# EAGLE board nixieshield-v1.0 (EAGLE 7.6.0)
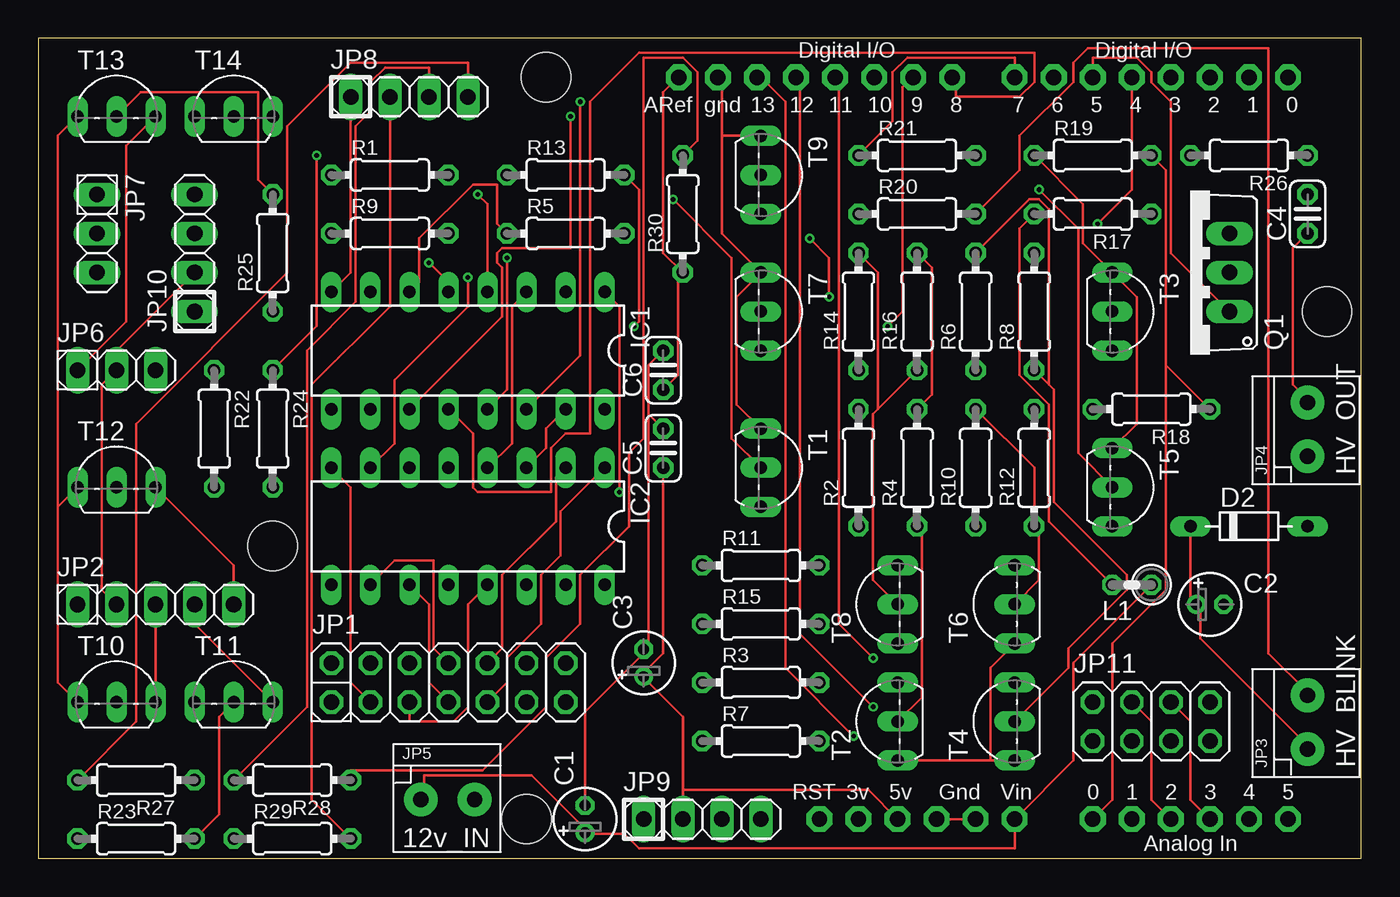
[diagram p0: board, top side]
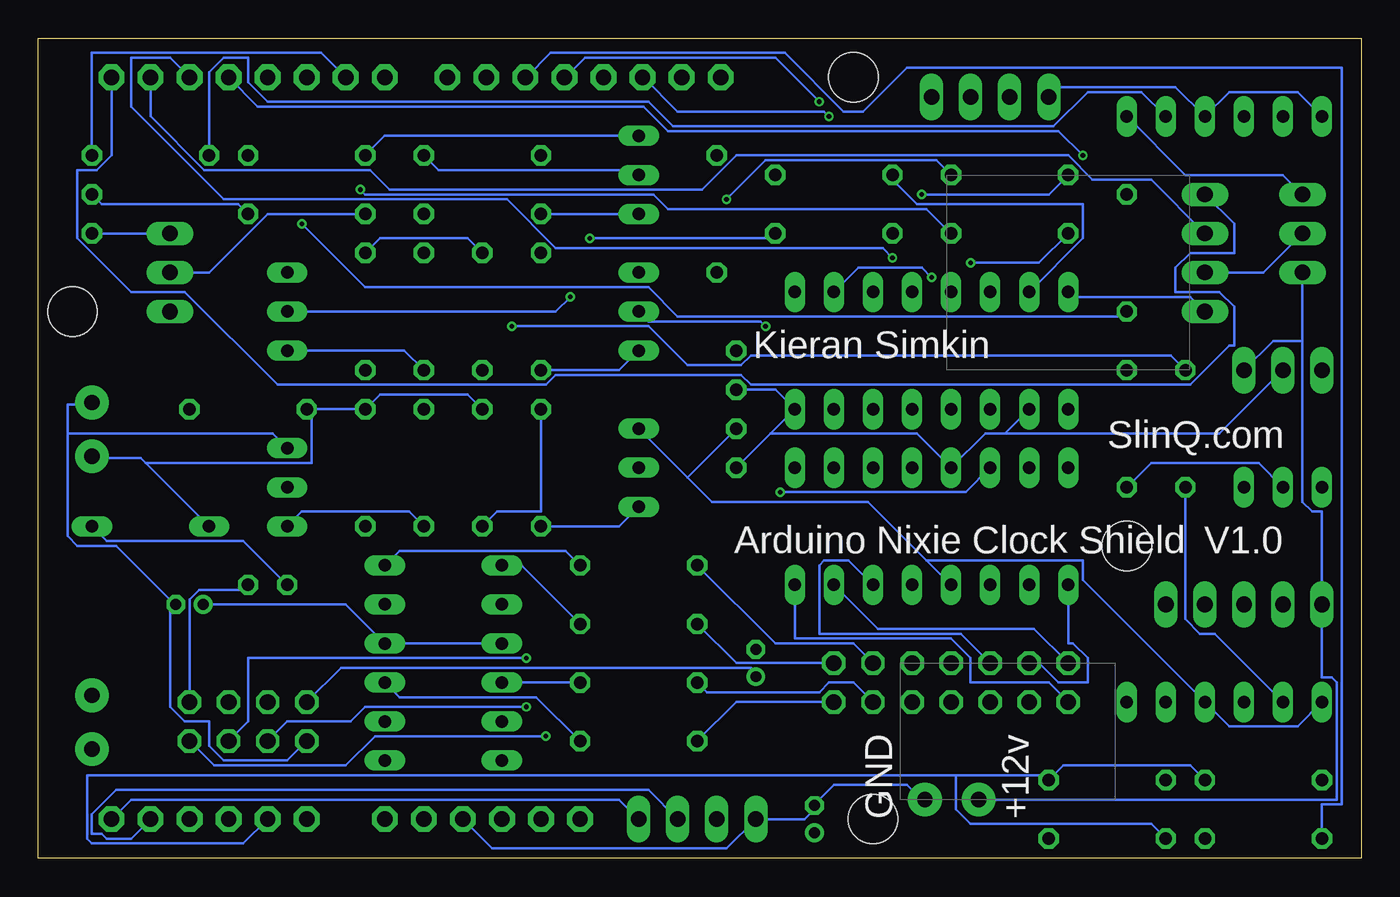
[diagram p1: board, bottom side, seen from below]

Size 86.03 x 53.33 mm. Coordinates in mm from the lower left corner, seen from the top.
Outline: 0,0 86.03,0 86.03,53.33 0,53.33 0,0
Copper layers (1*16): Top 0.035mm / dielectric 1.5mm / Bottom 0.035mm
Design rules "SeeedStudio_2layer_DRU_no_angle_20140221": minimum track width 6mil, minimum drill 12mil, track to track 6mil, track to pad 6mil, pad to pad 6mil, via to via 6mil, smd to smd 0mil, copper to edge 10mil, drill to drill 10mil, minimum pad ring 10mil, minimum via ring 6mil, stop-mask expansion 2mil, vias tented up to drill 100mil, thermal gap 10mil
Holes 3.2 mm at 15.24,20.32

## Footprints (pad centres in the part's own frame; a part is rotated, then mirrored left to right if it is on the bottom)
E1,8-4 = drill 0.711 pad 1.168: + -0.889,0 | drill 0.711 pad 1.168 octagon: - 0.889,0
C025-024X044 = drill 0.813 octagon: 1 -1.27,0; 2 1.27,0
D-7.5 = drill 0.813 long: A 3.81,0; C -3.81,0
DIL16 = drill 0.813 long: 1 -8.89,-3.81; 2 -6.35,-3.81; 3 -3.81,-3.81; 4 -1.27,-3.81; 5 1.27,-3.81; 6 3.81,-3.81; 7 6.35,-3.81; 8 8.89,-3.81; 9 8.89,3.81; 10 6.35,3.81; 11 3.81,3.81; 12 1.27,3.81; 13 -1.27,3.81; 14 -3.81,3.81; 15 -6.35,3.81; 16 -8.89,3.81
2X07 = drill 1.016 octagon: 1 -7.62,-1.27; 2 -7.62,1.27; 3 -5.08,-1.27; 4 -5.08,1.27; 5 -2.54,-1.27; 6 -2.54,1.27; 7 0,-1.27; 8 0,1.27; 9 2.54,-1.27; 10 2.54,1.27; 11 5.08,-1.27; 12 5.08,1.27; 13 7.62,-1.27; 14 7.62,1.27
1X05 = drill 1.016 long: 1 -5.08,0; 2 -2.54,0; 3 0,0; 4 2.54,0; 5 5.08,0
1X2-3.5MM = drill 1 pad 2.184: 1 1.8,0; 2 -1.7,0
1X03 = drill 1.016 long: 1 -2.54,0; 2 0,0; 3 2.54,0
1X04 = drill 1.016 long: 1 -3.81,0; 2 -1.27,0; 3 1.27,0; 4 3.81,0
2X04 = drill 1.016 octagon: 1 -3.81,-1.27; 2 -3.81,1.27; 3 -1.27,-1.27; 4 -1.27,1.27; 5 1.27,-1.27; 6 1.27,1.27; 7 3.81,-1.27; 8 3.81,1.27
0207/2V = drill 0.813 octagon: 1 -1.27,0; 2 1.27,0
TO220AV = drill 1.016 long: B -2.54,-2.54; C 0,-2.54; E 2.54,-2.54
0204/7 = drill 0.813 octagon: 1 -3.81,0; 2 3.81,0
TO92-EBC = drill 0.813 long: B 0,-1.27; C 2.54,-1.27; E -2.54,-1.27
TO92-EBC-OVAL = drill 0.813 long: B 0,-1.27; C 2.54,-1.27; E -2.54,-1.27
ARDUINO = drill 1 pad 1.676 octagon: 3V 35.56,2.54; 5V 38.1,2.54; A0 50.8,2.54; A1 53.34,2.54; A2 55.88,2.54; A3 58.42,2.54; A4 60.96,2.54; A5 63.5,2.54; AREF 23.876,50.8; D0 63.5,50.8; D1 60.96,50.8; D2 58.42,50.8; D3 55.88,50.8; D4 53.34,50.8; D5 50.8,50.8; D6 48.26,50.8; D7 45.72,50.8; D8 41.656,50.8; D9 39.116,50.8; D10 36.576,50.8; D11 34.036,50.8; D12 31.496,50.8; D13 28.956,50.8; GND 26.416,50.8; GND1 43.18,2.54; GND2 40.64,2.54; RESET 33.02,2.54; VIN 45.72,2.54 | hole 3.2: 15.24,50.8; 66.04,35.56; 13.97,2.54

## Placement (x,y rotation side)
C1  220uF  [E1,8-4]  35.56,2.54 90 top
C2  2.2uF 200v  [E1,8-4]  76.2,16.51 0 top
C3  220uF  [E1,8-4]  39.37,12.7 90 top
C4  100pF  [C025-024X044]  82.55,41.91 90 top
C5  100nF  [C025-024X044]  40.64,26.67 90 top
C6  100nF  [C025-024X044]  40.64,31.75 90 top
D2  4004  [D-7.5]  78.74,21.59 0 top
IC1  74HC595N  [DIL16]  27.94,33.02 180 top
IC2  IC_74141-DIP-16  [DIL16]  27.94,21.59 180 top
JP1  TUBES  [2X07]  26.67,11.43 0 top
JP2  ILLUM  [1X05]  7.62,16.51 0 top
JP3  HV_BLINK  [1X2-3.5MM]  82.55,8.89 270 top
JP4  HV_OUT  [1X2-3.5MM]  82.55,27.94 270 top
JP5  12v_IN  [1X2-3.5MM]  26.67,3.81 180 top
JP6  ALARM  [1X03]  5.08,31.75 0 top
JP7  BACKLIGHT  [1X03]  3.81,40.64 270 top
JP8  BUTTONS  [1X04]  24.13,49.53 0 top
JP9  I2C  [1X04]  43.18,2.54 0 top
JP10  UART  [1X04]  10.16,39.37 90 top
JP11  AUX  [2X04]  72.39,8.89 0 top
L1  120uH  [0207/2V]  71.12,17.78 180 top
Q1  IRL630A  [TO220AV]  74.93,38.1 90 top
R1  10k  [0204/7]  22.86,44.45 0 top
R2  470k  [0204/7]  53.34,25.4 90 top
R3  10k  [0204/7]  46.99,11.43 0 top
R4  100k  [0204/7]  57.15,25.4 90 top
R5  10k  [0204/7]  34.29,40.64 0 top
R6  470k  [0204/7]  60.96,35.56 90 top
R7  10k  [0204/7]  46.99,7.62 0 top
R8  100k  [0204/7]  64.77,35.56 90 top
R9  10k  [0204/7]  22.86,40.64 0 top
R10  470k  [0204/7]  60.96,25.4 90 top
R11  10k  [0204/7]  46.99,19.05 0 top
R12  100k  [0204/7]  64.77,25.4 90 top
R13  10k  [0204/7]  34.29,44.45 0 top
R14  470k  [0204/7]  53.34,35.56 90 top
R15  10k  [0204/7]  46.99,15.24 0 top
R16  100k  [0204/7]  57.15,35.56 90 top
R17  2k2  [0204/7]  68.58,41.91 180 top
R18  220k  [0204/7]  72.39,29.21 180 top
R19  2k2  [0204/7]  68.58,45.72 0 top
R20  10k  [0204/7]  57.15,41.91 0 top
R21  10k  [0204/7]  57.15,45.72 0 top
R22  1k  [0204/7]  11.43,27.94 270 top
R23  1k  [0204/7]  6.35,1.27 0 top
R24  1k  [0204/7]  15.24,27.94 270 top
R25  1k  [0204/7]  15.24,39.37 90 top
R26  1k  [0204/7]  78.74,45.72 180 top
R27  1k  [0204/7]  6.35,5.08 180 top
R28  4k7  [0204/7]  16.51,5.08 180 top
R29  10k  [0204/7]  16.51,1.27 0 top
R30  100k  [0204/7]  41.91,41.91 90 top
T1  MPSA44  [TO92-EBC]  48.26,25.4 270 top
T2  MPSA92  [TO92-EBC]  54.61,8.89 90 top
T3  MPSA44  [TO92-EBC]  71.12,35.56 270 top
T4  MPSA92  [TO92-EBC]  62.23,8.89 90 top
T5  MPSA44  [TO92-EBC]  71.12,24.13 270 top
T6  MPSA92  [TO92-EBC]  62.23,16.51 90 top
T7  MPSA44  [TO92-EBC]  48.26,35.56 270 top
T8  MPSA92  [TO92-EBC]  54.61,16.51 90 top
T9  MPSA44  [TO92-EBC]  48.26,44.45 270 top
T10  2N2222  [TO92-EBC-OVAL]  5.08,11.43 0 top
T11  2N2222  [TO92-EBC-OVAL]  12.7,11.43 0 top
T12  2N2222  [TO92-EBC-OVAL]  5.08,25.4 0 top
T13  2N2222  [TO92-EBC-OVAL]  5.08,49.53 0 top
T14  2N2222  [TO92-EBC-OVAL]  12.7,49.53 0 top
U$1  ARDUINOUNO  [ARDUINO]  17.78,0 0 top

## Library data of the parts
C1-C6 R1-R30 = resistor
D2 = diode
IC1 = 74xx-eu
IC2 = dp_devices
JP1 JP2 JP6-JP11 = pinhead
JP3-JP5 T10-T14 U$1 = adafruit
L1 = rcl
Q1 = transistor-power
T1-T9 = transistor

## Nets
+3V3: U$1.3V
+12V: C1.+ JP2.1 JP5.1 JP6.3 JP7.3 JP11.8 L1.1 U$1.VIN
A2: JP11.4 U$1.A2
A3: JP11.6 U$1.A3
ALARM: R25.1 U$1.D4
ANODE0: JP1.11 R3.1
ANODE1: JP1.12 R11.1
ANODE2: JP1.13 R7.1
ANODE3: JP1.14 R15.1
BACKLIGHT: R26.1 U$1.D6
BLINK: R21.1 U$1.D7
BOOSTPWM: Q1.B U$1.D5
BUTTONS: R27.1 R28.1 R29.1 R30.2 U$1.A1
DIGITS0: IC2.16 JP1.1
DIGITS1: IC2.15 JP1.2
DIGITS2: IC2.8 JP1.3
DIGITS3: IC2.9 JP1.4
DIGITS4: IC2.13 JP1.5
DIGITS5: IC2.14 JP1.6
DIGITS6: IC2.11 JP1.7
DIGITS7: IC2.10 JP1.8
DIGITS8: IC2.1 JP1.9
DIGITS9: IC2.2 JP1.10
GND: C1.- C2.- C3.- C4.1 C5.2 C6.2 IC1.8 IC2.12 JP4.2 JP5.2 JP8.1 JP9.1 JP10.1 JP11.1 Q1.E R19.1 T1.E T3.E T5.E T7.E T9.E T10.E T11.E T12.E T13.E T14.E U$1.GND U$1.GND1 U$1.GND2
LATCH: IC1.12 U$1.D8
LED_B: R24.1 U$1.D3
LED_G: R23.1 U$1.D10
LED_R: R22.1 U$1.D9
MISO: JP11.3 U$1.D12
MOSI: IC1.14 JP11.5 U$1.D11
N$1: IC1.1 IC2.6
N$2: IC1.2 IC2.7
N$3: IC1.3 IC2.4
N$4: IC1.15 IC2.3
N$5: R2.1 T1.C
N$6: R1.2 T1.B
N$7: R3.2 T2.C
N$8: R2.2 R4.1 T2.B
N$9: R5.2 T3.B
N$10: R7.2 T4.C
N$11: R6.1 T3.C
N$12: R6.2 R8.1 T4.B
N$13: R9.2 T5.B
N$14: R11.2 T6.C
N$15: R10.1 T5.C
N$16: R10.2 R12.1 T6.B
N$17: R13.2 T7.B
N$18: R15.2 T8.C
N$19: R14.1 T7.C
N$20: R14.2 R16.1 T8.B
N$21: D2.A L1.2 Q1.C R17.2
N$22: C4.2 R17.1
N$23: R20.1 T9.C
N$24: R21.2 T9.B
N$25: R22.2 T10.B
N$26: R23.2 T11.B
N$27: R24.2 T12.B
N$28: R25.2 T13.B
N$29: JP2.3 T10.C
N$30: JP2.4 T11.C
N$31: JP2.5 T12.C
N$32: JP3.2 R20.2
N$33: JP6.1 T13.C
N$34: R26.2 T14.B
N$35: JP7.1 T14.C
N$36: JP8.4 R27.2
N$37: JP8.3 R28.2
N$38: JP8.2 R29.2
OE: IC1.13 U$1.D2
RX: JP10.4 U$1.D0
SCK: IC1.11 JP11.7 U$1.D13
SCL: JP9.4 U$1.A5
SDA: JP9.3 U$1.A4
TUBE0: IC1.4 R1.1
TUBE1: IC1.5 R9.1
TUBE2: IC1.6 R5.1
TUBE3: IC1.7 R13.1
TX: JP10.3 U$1.D1
V+: C2.+ D2.C JP3.1 JP4.1 R4.2 R8.2 R12.2 R16.2 R18.2 T2.E T4.E T6.E T8.E
VCC: C3.+ C5.1 C6.1 IC1.10 IC1.16 IC2.5 JP2.2 JP6.2 JP7.2 JP9.2 JP10.2 JP11.2 R30.1 U$1.5V U$1.AREF
VSENSE: R18.1 R19.2 U$1.A0

## Tracks (layer width: path | path; a pad name or v marks a point on that pad's centre or on a via)
+12V
  Top 0.152: JP5.1 25.08,3.81 25.08,5.4 32.07,5.4 35.56,1.91 C1.+ 35.56,1.59 38.1,1.59 39.05,0.64 63.5,0.64 U$1.VIN 67.31,6.35 67.31,12.7 L1.1
  Bottom 0.152: JP7.3 3.81,33.66 | 3.81,33.66 3.81,23.18 3.17,22.54 2.54,22.54 JP2.1 2.54,11.75 1.91,11.75 1.59,11.43 1.59,3.81 JP5.1 | JP6.3 5.71,33.66 3.81,33.66 | L1.1 72.71,17.46 75.56,17.46 76.2,16.83 JP11.8
A2
  Top 0.152: JP11.4 72.39,8.89 72.39,3.81 U$1.A2
A3
  Top 0.152: JP11.6 74.93,8.89 74.93,3.81 U$1.A3
ALARM  (via drill 0.3)
  Top 0.152: v68.9,41.28 71.12,43.5 U$1.D4
  Bottom 0.152: R25.1 15.56,35.24 44.45,35.24 46.35,37.15 64.77,37.15 v68.9,41.28
ANODE0
  Bottom 0.152: R3.1 42.55,10.8 35.24,10.8 34.61,11.43 33.02,11.43 JP1.11
ANODE1
  Bottom 0.152: R11.1 38.1,13.97 33.02,13.97 JP1.12
ANODE2
  Bottom 0.152: R7.1 40.64,10.16 JP1.13
ANODE3
  Bottom 0.152: R15.1 40.64,12.7 JP1.14
BACKLIGHT
  Bottom 0.152: R26.1 82.55,52.39 67.63,52.39 U$1.D6
BLINK
  Top 0.152: R21.1 55.56,47.94 55.56,51.12 56.52,52.07 63.5,52.07 U$1.D7
BOOSTPWM
  Top 0.152: Q1.B 73.66,39.37 73.66,49.21 72.39,50.48 72.39,51.12 71.44,52.07 68.58,52.07 U$1.D5
BUTTONS
  Top 0.152: R30.2 42.86,46.67 42.86,51.12 41.91,52.07 39.37,52.07 39.37,27.31 38.42,26.35 38.42,21.59 35.24,18.41 35.24,15.24 33.02,13.02 33.02,9.84 28.89,5.71 20.32,5.71 R28.1
  Bottom 0.152: R29.1 13.65,2.22 25.4,2.22 26.35,3.18 26.35,5.4 | 26.35,5.4 20.64,5.4 R28.1 19.37,6.03 11.11,6.03 R27.1 | U$1.A1 72.71,0.95 82.55,0.95 82.87,1.27 82.87,5.4 26.35,5.4
DIGITS0
  Bottom 0.152: IC2.16 36.83,14.29 26.67,14.29 25.4,13.02 25.4,11.43 20.32,11.43 JP1.1
DIGITS1
  Bottom 0.152: IC2.15 31.43,14.92 21.27,14.92 JP1.2
DIGITS2
  Top 0.152: IC2.8 20.32,24.13 20.32,11.43 JP1.3
DIGITS3
  Bottom 0.152: IC2.9 19.05,13.97 18.73,13.97 17.78,13.02 17.78,11.43 19.68,11.43 20.95,12.7 JP1.4
DIGITS4
  Top 0.152: IC2.13 27.94,16.51 27.94,9.84 26.99,8.89 24.13,8.89 JP1.5
DIGITS5
  Bottom 0.152: IC2.14 33.34,19.37 34.92,19.37 35.24,19.05 35.24,14.61 26.04,14.61 JP1.6
DIGITS6
  Top 0.152: IC2.11 25.4,16.51 25.4,11.43 JP1.7
DIGITS7
  Top 0.152: IC2.10 23.18,19.37 25.72,19.37 25.72,13.65 JP1.8
DIGITS8
  Top 0.152: IC2.1 33.97,22.54 33.97,19.68 32.7,18.41 32.7,15.24 30.48,13.02 30.48,11.43 JP1.9
DIGITS9
  Top 0.152: IC2.2 33.66,24.77 33.66,21.91 30.16,18.41 30.16,13.65 JP1.10
GND
  Top 0.152: R19.1 67.94,42.55 67.94,40 T3.E 71.44,36.51 71.44,28.26 T5.E | C4.1 81.6,39.69 81.6,30.8 82.55,29.85 JP4.2 | U$1.GND1 U$1.GND2 | C1.- 35.56,9.53 39.37,13.34 C3.- 39.37,13.65 39.69,13.97 39.69,28.89 | IC1.8 20.32,38.1 JP8.1 | 1.27,22.86 T12.E | 1.27,22.86 1.27,11.43 T10.E | 44.45,46.99 44.45,50.8 U$1.GND | 44.45,46.99 44.45,40.64 T7.E 45.4,36.51 45.4,29.53 T1.E | 44.45,46.99 T9.E | C6.2 39.69,32.07 39.69,28.89 | C5.2 39.69,28.89 | T13.E 1.27,46.99 1.27,22.86
  Bottom 0.152: Q1.E C4.1 | 77.15,16.51 80.96,20.32 83.5,20.32 84.14,20.96 84.14,27.62 | 84.14,27.62 84.14,29.53 82.55,29.53 JP4.2 | T5.E 70.8,27.62 84.14,27.62 | JP11.1 69.85,6.35 73.98,6.35 74.93,7.3 74.93,8.89 76.52,8.89 77.47,9.84 77.47,16.51 77.15,16.51 | 77.15,16.51 C2.- | U$1.GND2 56.52,0.64 41.27,0.64 JP9.1 36.2,2.54 35.56,3.18 C1.- 35.56,3.49 34.29,4.76 29.53,4.76 28.57,3.81 JP5.2 | T13.E 4.13,49.85 8.57,49.85 T14.E 12.06,50.17 19.68,50.17 JP8.1 | JP10.1 11.11,36.51 18.73,36.51 IC1.8 | T10.E 4.13,8.57 8.57,8.57 T11.E 18.1,18.1 18.1,19.37 28.26,19.37 | 28.26,19.37 32.07,23.18 42.23,23.18 43.81,24.77 | 28.26,19.37 IC2.12 | T1.E 43.81,24.77 | 43.81,24.77 C5.2 | R19.1 63.5,46.99 T9.E
LATCH
  Top 0.152: IC1.12 28.26,27.62 28.26,24.13 28.57,23.81 33.34,23.81 33.34,26.67 34.29,27.62 35.88,27.62 35.88,49.21 39.05,52.39 64.77,52.39 64.77,50.48 63.82,49.53 59.69,49.53 59.69,50.8 U$1.D8
LED_B  (via drill 0.3)
  Top 0.152: R24.1 18.1,34.61 v18.1,45.72
  Bottom 0.152: v18.1,45.72 19.68,47.31 45.09,47.31 46.67,48.89 71.75,48.89 U$1.D3
LED_G
  Bottom 0.152: R23.1 2.54,3.49 1.27,3.49 1.27,51.44 29.53,51.44 32.38,48.58 33.66,48.58 37.47,52.39 52.7,52.39 54.29,50.8 U$1.D10
LED_R  (via drill 0.3)
  Top 0.152: v55.24,34.61 56.2,35.56 56.2,50.17 56.83,50.8 U$1.D9
  Bottom 0.152: R22.1 12.38,32.7 39.69,32.7 40.32,32.07 43.81,32.07 46.35,34.61 v55.24,34.61
MISO  (via drill 0.3)
  Top 0.152: v54.29,9.84 49.53,14.61 49.53,50.8 U$1.D12
  Bottom 0.152: JP11.3 69.85,8.89 65.72,8.89 64.77,9.84 v54.29,9.84
MOSI  (via drill 0.3)
  Top 0.152: IC1.14 35.24,32.7 v35.24,49.21 | v54.29,13.02 52.07,15.24 52.07,50.8 U$1.D11
  Bottom 0.152: v35.24,49.21 38.1,52.07 50.48,52.07 51.75,50.8 U$1.D11 | JP11.5 72.39,8.89 72.39,13.02 v54.29,13.02
N$1  (via drill 0.3)
  Top 0.152: v37.78,23.81 37.78,35.88 IC1.1
  Bottom 0.152: IC2.6 25.72,23.81 v37.78,23.81
N$2  (via drill 0.3)
  Top 0.152: IC2.7 23.18,26.99 23.18,31.11 27.94,35.88 v27.94,37.78
  Bottom 0.152: v27.94,37.78 28.57,38.42 32.7,38.42 IC1.2
N$3
  Top 0.152: IC2.4 30.8,26.99 30.8,35.88 IC1.3
N$4
  Top 0.152: IC2.3 33.02,26.67 33.02,27.94 IC1.15
N$5
  Bottom 0.152: T1.C 48.26,21.59 R2.1
N$6  (via drill 0.3)
  Top 0.152: v41.27,42.86 45.09,39.05 45.09,27.31 T1.B
  Bottom 0.152: R1.2 27.62,45.4 38.73,45.4 v41.27,42.86
N$7
  Bottom 0.152: T2.C R3.2
N$8
  Top 0.152: T2.B 57.47,10.48 57.47,21.27 R4.1
  Bottom 0.152: R2.2 53.34,22.54 56.2,22.54 R4.1
N$9  (via drill 0.3)
  Top 0.152: v50.16,40.32 51.44,39.05 v51.44,36.51
  Bottom 0.152: R5.2 38.42,40.32 v50.16,40.32 | v51.44,36.51 52.39,35.56 T3.B
N$10
  Bottom 0.152: R7.2 53.66,10.48 62.55,10.48 T4.C
N$11
  Bottom 0.152: R6.1 62.23,33.02 T3.C
N$12
  Top 0.152: T4.B 66.99,12.38 66.99,13.65 70.8,17.46 70.8,18.41 66.04,23.18 66.04,30.48 65.72,30.8 | R8.1 65.72,30.8 | R6.2 64.45,42.86 65.09,42.86 65.72,42.23 65.72,30.8
N$13  (via drill 0.3)
  Top 0.152: v65.09,43.5 67.63,40.96 67.63,26.35 T5.B
  Bottom 0.152: R9.2 28.26,42.23 45.09,42.23 46.04,43.18 64.77,43.18 v65.09,43.5
N$14
  Bottom 0.152: R11.2 51.75,20 62.55,20 T6.C
N$15
  Bottom 0.152: R10.1 61.91,22.54 68.9,22.54 T5.C
N$16
  Top 0.152: T6.B 65.09,18.1 65.09,21.27 R12.1 64.77,25.4 R10.2
N$17  (via drill 0.3)
  Top 0.152: R13.2 39.05,43.5 39.05,34.92 v38.73,34.61
  Bottom 0.152: v38.73,34.61 39.05,34.92 46.35,34.92 T7.B
N$18
  Bottom 0.152: R15.2 54.61,19.05 T8.C
N$19
  Bottom 0.152: T7.C 48.26,31.75 R14.1
N$20
  Top 0.152: T8.B 54.29,18.1 54.29,28.89 54.61,29.21 | R16.1 54.61,29.21 | R14.2 54.61,38.1 54.61,29.21
N$21
  Top 0.152: L1.2 65.72,21.91 65.72,29.53 63.82,31.43 63.82,40.96 R17.2
  Bottom 0.152: L1.2 72.71,20.64 81.6,20.64 D2.A | R17.2 71.12,41.91 74.93,38.1 Q1.C
N$22
  Bottom 0.152: R17.1 73.03,42.55 81.92,42.55 C4.2
N$23
  Bottom 0.152: R20.1 T9.C
N$24
  Bottom 0.152: T9.B 47.31,44.77 60.01,44.77 R21.2
N$25
  Bottom 0.152: T10.B 9.53,14.61 10.48,14.61 11.43,15.56 R22.2
N$26
  Top 0.152: R23.2 11.75,2.86 11.75,9.21 T11.B
N$27
  Bottom 0.152: T12.B 6.67,25.72 13.65,25.72 R24.2
N$28
  Top 0.152: T13.B 6.67,49.85 14.29,49.85 14.29,44.13 R25.2
N$29
  Top 0.152: JP2.3 T10.C
N$30
  Top 0.152: T11.C 10.16,15.24 JP2.4
N$31
  Top 0.152: T12.C 12.7,19.05 JP2.5
N$32
  Top 0.152: R20.2 63.82,44.77 63.82,46.99 67.31,50.48 67.31,51.75 68.26,52.7 80.01,52.7 80.01,13.34 82.55,10.8 JP3.2
N$33
  Top 0.152: T13.C 5.71,46.36 5.71,34.92 JP6.1
N$34
  Bottom 0.152: T14.B 14.29,49.85 17.78,49.85 20,47.62 44.77,47.62 46.35,49.21 71.12,49.21 72.39,50.48 72.39,52.07 73.98,52.07 74.93,51.12 R26.2
N$35
  Bottom 0.152: T14.C 11.43,44.45 5.08,44.45 JP7.1
N$36
  Top 0.152: R27.2 6.35,8.89 6.35,28.26 16.19,38.1 16.19,47.62 20.32,51.75 27.94,51.75 JP8.4
N$37
  Top 0.152: R28.2 17.46,9.84 17.46,33.02 20.64,36.2 20.64,47.62 21.59,48.58 21.59,50.48 22.54,51.44 25.4,51.44 JP8.3
N$38
  Top 0.152: R29.2 17.78,3.81 17.78,30.8 22.86,35.88 JP8.2
OE  (via drill 0.3)
  Top 0.152: IC1.13 30.48,30.48 v30.48,39.05
  Bottom 0.152: v30.48,39.05 31.11,39.69 52.39,39.69 55.56,42.86 73.98,42.86 80.01,48.89 80.01,52.07 77.47,52.07 U$1.D2
RX
  Bottom 0.152: JP10.4 8.26,41.28 8.26,39.37 11.11,39.37 12.06,38.42 12.06,36.83 9.21,36.83 8.26,35.88 8.26,33.34 8.57,33.34 11.11,30.8 39.69,30.8 40.32,31.43 52.39,31.43 53.02,30.8 70.48,30.8 76.52,36.83 80.01,36.83 83.5,40.32 83.5,44.77 82.23,44.77 81.28,45.72 U$1.D0
SCK  (via drill 0.3)
  Top 0.152: IC1.11 30.16,35.24 30.16,38.42 29.84,38.73 29.84,39.37 30.16,39.69 34.61,39.69 v34.61,48.26 | v53.02,7.94 48.58,12.38 48.58,49.21 46.99,50.8 U$1.D13
  Bottom 0.152: v34.61,48.26 34.92,48.58 44.45,48.58 46.67,50.8 U$1.D13 | JP11.7 74.61,6.03 66.04,6.03 64.14,7.94 v53.02,7.94
SCL
  Bottom 0.152: JP9.4 48.26,3.81 80.01,3.81 U$1.A5
SDA
  Bottom 0.152: JP9.3 46.35,4.45 80.96,4.45 82.55,2.86 82.55,1.59 81.92,1.59 81.6,1.27 80.01,1.27 U$1.A4
TUBE0  (via drill 0.3)
  Top 0.152: v28.57,43.18 29.21,42.55 IC1.4
  Bottom 0.152: R1.1 20.32,43.18 v28.57,43.18
TUBE1  (via drill 0.3)
  Top 0.152: v25.4,38.73 26.67,37.47 IC1.5
  Bottom 0.152: R9.1 20.95,38.73 v25.4,38.73
TUBE2
  Top 0.152: IC1.6 24.77,37.47 24.77,40.32 28.26,43.81 29.84,43.81 29.84,41.28 R5.1
TUBE3
  Bottom 0.152: IC1.7 18.1,40.32 18.1,42.55 28.89,42.55 30.48,44.13 R13.1
TX
  Bottom 0.152: JP10.3 13.65,44.13 17.46,44.13 19.05,45.72 40.64,45.72 42.86,43.5 63.18,43.5 64.45,44.77 75.25,44.77 78.74,48.26 U$1.D1
V+
  Top 0.152: R16.2 58.1,38.42 58.1,30.16 R4.2 | T4.E 61.91,6.35 | 61.91,6.35 T2.E | 61.91,6.35 61.91,12.38 T6.E | D2.C 74.93,16.83 75.25,16.51 C2.+ 75.56,16.51 75.56,14.29 82.55,7.3 JP3.1
  Bottom 0.152: R16.2 58.1,40.32 63.82,40.32 R8.2 | R4.2 58.1,30.16 63.82,30.16 R12.2 68.26,29.21 | T8.E T6.E 66.04,16.51 C2.+ | 79.06,25.72 79.38,26.04 82.55,26.04 JP4.1 | 79.06,25.72 D2.C | 68.26,29.21 68.26,25.72 79.06,25.72 | 68.26,29.21 R18.2
VCC
  Top 0.152: JP9.2 41.91,4.45 | 41.91,4.45 41.91,9.21 39.37,11.75 C3.+ 39.37,12.07 40.64,13.34 C5.1 | U$1.5V 53.98,4.45 41.91,4.45 | JP2.2 4.13,17.46 4.13,30.8 JP6.2 5.08,33.02 JP10.2 | C6.1 41.59,31.43 41.59,37.78 R30.1 40.64,39.37 40.64,49.85 41.59,50.8 U$1.AREF
  Bottom 0.152: JP11.2 66.36,12.38 39.69,12.38 39.37,12.07 C3.+ | JP7.2 6.35,38.1 JP10.2 | 23.18,27.62 24.45,27.62 IC2.5 28.89,27.62 38.42,27.62 | IC1.10 23.18,27.62 | C6.1 38.1,30.48 IC1.16 38.42,27.62 | 38.42,27.62 C5.1 | JP6.2 9.21,27.62 23.18,27.62
VSENSE
  Top 0.152: 73.34,32.07 R18.1 | 73.34,32.07 73.34,44.77 R19.2 | U$1.A0 69.85,3.81 69.85,13.97 73.34,17.46 73.34,32.07

## Text on the board
bPlace: Kieran Simkin | SlinQ.com | V1.0 | Arduino Nixie Clock Shield | +12v | GND